# Altium PCB LED.PcbDoc
Units mm, origin at the board's own origin, x right, y up, seen from the top; angles counter-clockwise.
Board outline 80 x 60 mm, 2 copper layers (Top Layer, Bottom Layer), stack 1.671 mm thick; 33 components, 4 nets, 66 pads, 0 vias.
Unrouted connection lines stored in the file: 62.
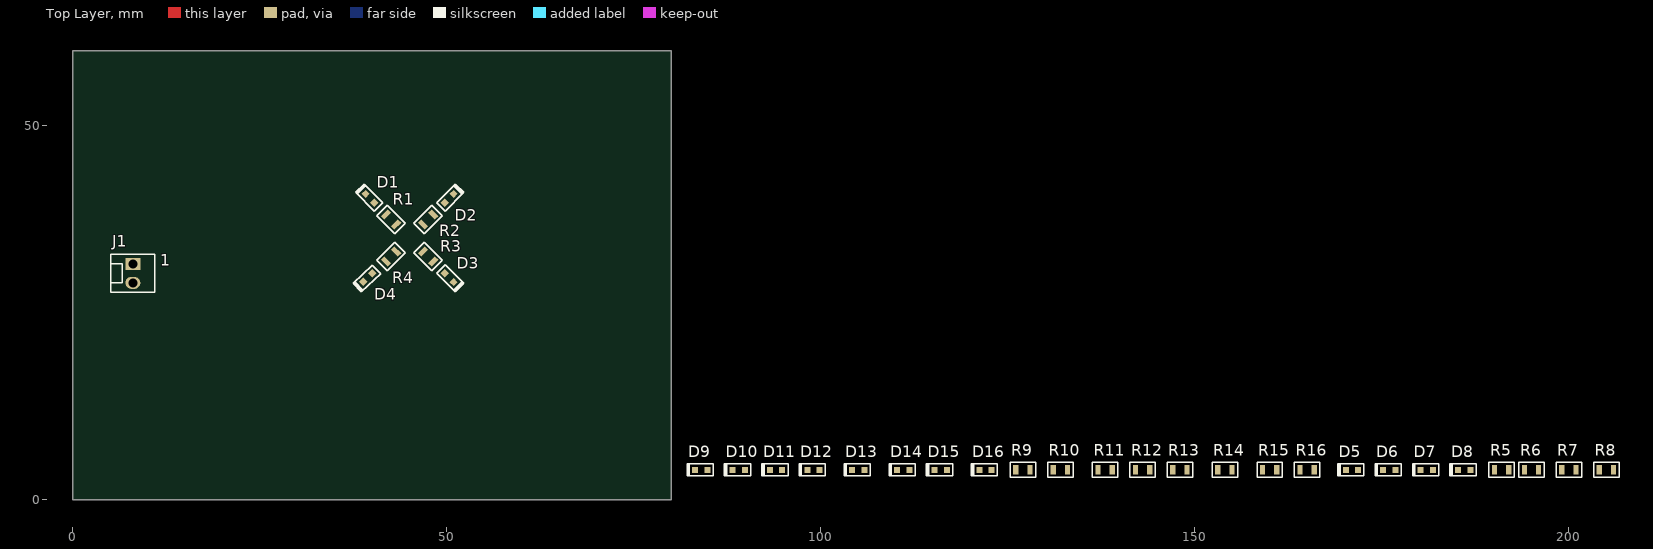
[diagram p0: Top Layer view]
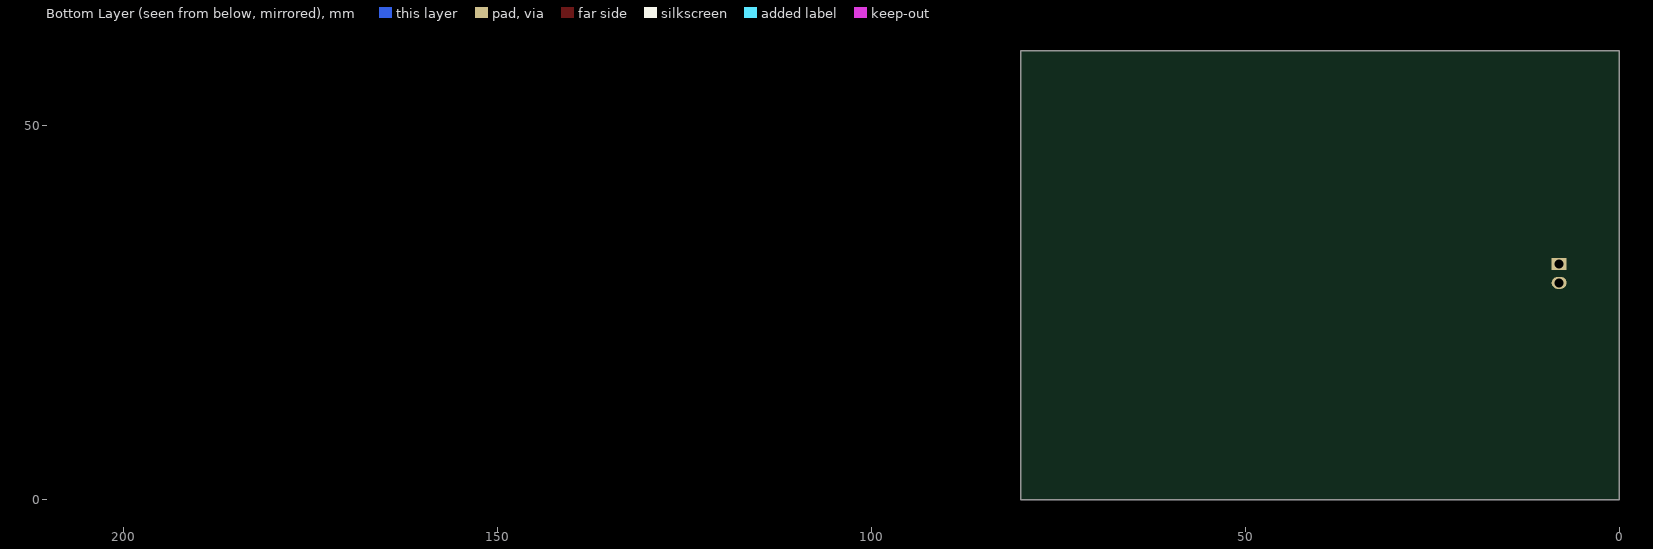
[diagram p1: Bottom Layer view, seen from below]

## Layer stack, top to bottom
Top Solder: solder mask 0.0102, Solder Resist, Dk 3.5
Top Layer: signal copper 0.0356
Dielectric 1: dielectric 1.6, FR-4, Dk 4.8
Bottom Layer: signal copper 0.0356
Bottom Solder: solder mask 0.0102, Solder Resist, Dk 3.5

## Board outline
80,0 80,60 0,60 0,0

## Design rules (kind name [scope] priority, off if disabled: settings)
Clearance [All] p1: gap=0.3 ignorepadtopadclearanceinfootprint=FALSE
PolygonConnect [All] p1: connectstyle=Relief reliefconductorwidth=0.254 reliefentries=4 polygonreliefangle="90 Angle" airgapwidth=0.254
RoutingVias [All] p1: holewidth=0.3 width=0.6 viastyle="Through Hole" minholewidth=0.3 minwidth=0.6 maxholewidth=0.3 maxwidth=0.6
SilkToSolderMaskClearance [IsPad] p1: minsilkscreentomaskgap=0.1 clearancetoexposedcopper=TRUE
SolderMaskExpansion [All] p1: expansion=0.102
Width [All] p1: maxlimit=1 minlimit=0.3 preferedwidth=0.5
29 further rules are at their usual default settings.

## Components (designator, comment, footprint, x,y, rotation, side; value= is the part's Value field where it differs from the comment)
D1 "GREEN" LED0603G 39.697,40.303 r315 top
D2 "GREEN" LED0603G 50.303,40.303 r225 top
D3 "GREEN" LED0603G 50.303,29.697 r135 top
D4 "GREEN" LED0603G 39.402,29.704 r43.41 top
D5 "GREEN" LED0603G 171,4 r0 top
D6 "GREEN" LED0603G 176,4 r0 top
D7 "GREEN" LED0603G 181,4 r0 top
D8 "GREEN" LED0603G 186,4 r0 top
D9 "GREEN" LED0603G 84,4 r0 top
D10 "GREEN" LED0603G 89,4 r0 top
D11 "GREEN" LED0603G 94,4 r0 top
D12 "GREEN" LED0603G 99,4 r0 top
D13 "GREEN" LED0603G 105,4 r0 top
D14 "GREEN" LED0603G 111,4 r0 top
D15 "GREEN" LED0603G 116,4 r0 top
D16 "GREEN" LED0603G 122,4 r0 top
J1 "1x2 Header" HDR1X2 8,31.54 r0 top
R1 "360R" R0805 42.525,37.475 r135 top
R2 "360R" R0805 47.475,37.475 r45 top
R3 "360R" R0805 47.475,32.525 r315 top
R4 "360R" R0805 42.525,32.525 r225 top
R5 "360R" R0805 191,4 r0 top
R6 "360R" R0805 195,4 r0 top
R7 "360R" R0805 200,4 r0 top
R8 "360R" R0805 205,4 r0 top
R9 "360R" R0805 127,4 r0 top
R10 "360R" R0805 132,4 r0 top
R11 "360R" R0805 138,4 r0 top
R12 "360R" R0805 143,4 r0 top
R13 "360R" R0805 148,4 r0 top
R14 "360R" R0805 154,4 r0 top
R15 "360R" R0805 160,4 r0 top
R16 "360R" R0805 165,4 r0 top

## Footprints (in the part's own frame and the unit in brackets; to place one, negate y for a bottom-side part, rotate by r counter-clockwise, add the part's x,y. Pads: shape width x height; smd on the part's side, far side on the other; paste and mask are expansions set on the pad)
HDR1X2 [mm]
  rect 2x1.6 hole 1.2: 1(0,0)
  oval 2x1.6 hole 1.2: 2(0,-2.54)
  silkscreen extent -2.92,-3.81 2.92,1.27, body extent -2.9,-3.81 2.9,1.27, height 11.71
LED0603G [mm]
  rect 0.8x0.8 smd: 1(-0.825,0) 2(0.825,0)
  silkscreen extent -1.9,-0.8 1.6,0.8, body extent -0.8,-0.4 0.8,0.4, height 0.4
R0805 [mm]
  rect 0.7x1.3 smd: 1(-0.95,0) 2(0.95,0)
  silkscreen extent -1.7,-1 1.7,1, body extent -1,-0.62 1,0.62, height 0.61

## Part data
D1 D2 D3 D4 D5 D6 D7 D8 D9 D10 D11 D12 D13 D14 D15 D16: library part LNJ337W83RA, "Standard LEDs - SMD LED GR HI-BRT USS", Case/Package=0603, Case Code (Metric)=1608, Colour=Green,Yellow, Forward Current=20mA, Forward Voltage=1.95V, Illumination Colour=Green, Manufacturer="Panasonic SSG", Max Operating Temperature=85°C, Max Power Dissipation=55mW, Min Operating Temperature=-30°C, Package Quantity=1, Reverse Voltage=4V, Supplier Part Number 1=LNJ337W83RADKR-ND, Test Current=5mA, Case Code (Imperial)=0603, Category=Optoelectronics, ComponentLink1Description=https://datasheet.ciiva.com/6868/lnj337w83ra-aek-6868817.pdf, ComponentLink1URL=https://datasheet.ciiva.com/6868/lnj337w83ra-aek-6868817.pdf, ComponentLink2Description=https://datasheet.ciiva.com/4690/lnj337w83ra-aek-226051-4690026.pdf, ComponentLink2URL=https://datasheet.ciiva.com/4690/lnj337w83ra-aek-226051-4690026.pdf, ComponentLink3Description=https://datasheet.ciiva.com/11775/0900766b80f0a8bb-11775418.pdf, ComponentLink3URL=https://datasheet.ciiva.com/11775/0900766b80f0a8bb-11775418.pdf, Dominant Wavelength=572nm, Height=0.2mm, Lead Free="Lead Free", Length=1.6mm, Lens Style=Rectangular, Luminous Intensity=7.5mcd, Manufacturer Part Number=LNJ337W83RA, Mount="Surface Mount", Number of LEDs=1, Number of Pins=2, Packaging="Tape and Reel", Pricing 1="1=0.48, 10=0.343, 25=0.28, 100=0.2239, 250=0.18888, 500=0.1609, 1000=0.12593, 2500=0.11544 (USD)", REACH SVHC=Yes, Stock 1=200597, Supplier 1=Digi-Key, Wavelength=572nm, Width=0.8mm
J1: library part 22-29-2021, "Headers & Wire Housings 2 PIN F/LK HEADER", Colour=White, Contact Resistance=10mR, Current Rating=4A, Flammability Rating="UL94 V-0", Manufacturer=Molex, Max Operating Temperature=75°C, Max Voltage Rating (AC)=250V, Min Operating Temperature=0°C, Package Quantity=2500, Supplier Part Number 1=WM2744-ND, Category=Connectors, ComponentLink1Description=https://datasheet.ciiva.com/30169/113840022292021-pcb-headers-30169888.pdf, ComponentLink1URL=https://datasheet.ciiva.com/30169/113840022292021-pcb-headers-30169888.pdf, ComponentLink2Description=https://datasheet.ciiva.com/19472/879588-19472951.pdf, ComponentLink2URL=https://datasheet.ciiva.com/19472/879588-19472951.pdf, ComponentLink3Description=https://datasheet.ciiva.com/11752/0900766b80d5fb7a-11752634.pdf, ComponentLink3URL=https://datasheet.ciiva.com/11752/0900766b80d5fb7a-11752634.pdf, ComponentLink4Description=https://datasheet.ciiva.com/5153/0022292021-pcb-headers-159390-5153053.pdf, ComponentLink4URL=https://datasheet.ciiva.com/5153/0022292021-pcb-headers-159390-5153053.pdf, ComponentLink5Description=https://datasheet.ciiva.com/9468/0022292021-pcb-headers-9468301.pdf, ComponentLink5URL=https://datasheet.ciiva.com/9468/0022292021-pcb-headers-9468301.pdf, ComponentLink6Description=https://datasheet.ciiva.com/25908/0022292021-pcb-headers-25908286.pdf, ComponentLink6URL=https://datasheet.ciiva.com/25908/0022292021-pcb-headers-25908286.pdf, Contact Material=Brass, Contact Plating=Gold, Depth=5.8mm, Gender=Male, Glow Wire Compliant=Non-compliant, Halogen Free="Low Halogen", Height=11.7mm, Housing Colour=White, Housing Material=Nylon, Lead Free="Lead Free", Length=12.7mm, Manufacturer Part Number=22-29-2021, Max Current Rating=4A, Mount="Through Hole", Number of Circuits=2, Number of Contacts=2, Number of Positions=2, Number of Rows=1, Orientation=Straight, Packaging=Bulk, Pitch=2.54mm, Pricing 1="1=0.46, 10=0.431, 100=0.3014, 500=0.2583, 1000=0.21525, 5000=0.1845, 10000=0.1722 (USD)", Radiation Hardening=No, REACH SVHC=Unknown, Stock 1=17589, Supplier 1=Digi-Key, Termination="Through Hole", Voltage Rating=250V, Voltage Rating (DC)=250V
R1 R2 R3 R4 R5 R6 R7 R8 R9 R10 R11 R12 R13 R14 R15 R16: library part CRCW0805360RFKEA, "RES SMD 360 OHM 1% 1/8W 0805", Case/Package=0805, Case Code (Metric)=2012, Manufacturer=Vishay, Max Operating Temperature=155°C, Max Power Dissipation=125mW, Min Operating Temperature=-55°C, Package Quantity=10, Supplier Part Number 1=541-360CDKR-ND, Temperature Coefficient=100ppm/°C, Tolerance=1%, Voltage Rating=150V, Case Code (Imperial)=0805, Category=Resistors, ComponentLink1Description=https://datasheet.ciiva.com/11812/0900766b80d98b26-11812609.pdf, ComponentLink1URL=https://datasheet.ciiva.com/11812/0900766b80d98b26-11812609.pdf, ComponentLink2Description=https://datasheet.ciiva.com/7881/1697337-7881957.pdf, ComponentLink2URL=https://datasheet.ciiva.com/7881/1697337-7881957.pdf, ComponentLink3Description=https://datasheet.ciiva.com/7881/1697337-7881958.pdf, ComponentLink3URL=https://datasheet.ciiva.com/7881/1697337-7881958.pdf, ComponentLink4Description=https://datasheet.ciiva.com/8942/dcrcwe3-8942598.pdf, ComponentLink4URL=https://datasheet.ciiva.com/8942/dcrcwe3-8942598.pdf, ComponentLink5Description=https://datasheet.ciiva.com/22674/1847332-22674713.pdf, ComponentLink5URL=https://datasheet.ciiva.com/22674/1847332-22674713.pdf, ComponentLink6Description=https://datasheet.ciiva.com/2467/dcrcwe3-2467773.pdf, ComponentLink6URL=https://datasheet.ciiva.com/2467/dcrcwe3-2467773.pdf, ComponentLink7Description=https://datasheet.ciiva.com/2467/dcrcwe3-2467774.pdf, ComponentLink7URL=https://datasheet.ciiva.com/2467/dcrcwe3-2467774.pdf, ComponentLink8Description=https://datasheet.ciiva.com/5543/dcrcwe3-109170-5543710.pdf, ComponentLink8URL=https://datasheet.ciiva.com/5543/dcrcwe3-109170-5543710.pdf, ComponentLink9Description=https://datasheet.ciiva.com/2467/dcrcwe3-2467775.pdf, ComponentLink9URL=https://datasheet.ciiva.com/2467/dcrcwe3-2467775.pdf, Composition="Thick Film", Contact Plating=Tin, Depth=1.25mm, Features="Automotive AEC-Q200", Height=0.45mm, Lead Free="Lead Free", Length=2mm, Manufacturer Part Number=CRCW0805360RFKEA, Military Standard=Not, Number of Pins=2, Number of Terminations=2, Packaging="Tape and Reel", Power Rating=125mW, Pricing 1="1=0.1, 10=0.055, 100=0.0223, 1000=0.01003, 2500=0.0087 (USD)", Radiation Hardening=No, REACH SVHC=Unknown, Resistance=360R, Stock 1=29980, Supplier 1=Digi-Key, Termination=SMD/SMT, Voltage Rating (DC)=150V, Weight=0.000194oz, Width=0.049inch

## Nets (pads, with @x,y where several pads share a name; then routed paths per layer and width w, separated by ;. In a path a pad name is that pad's centre, name@x,y a point inside that pad or via, vN(x,y) a via of type N, cw(c..) or ccw(c..) an arc to the next point about the centre after c; other vN are vias at no path point)
+3V3: J1.1 R1.1 R2.1 R3.1 R4.1 R5.1 R6.1 R7.1 R8.1 R9.1 R10.1 R11.1 R12.1 R13.1 R14.1 R15.1 R16.1
DIODE1: D2.2 D4.2 D6.2 D8.2 D10.2 D12.2 D14.2 D16.2 R2.2 R4.2 R6.2 R8.2 R10.2 R12.2 R14.2 R16.2
DIODE2: D1.2 D3.2 D5.2 D7.2 D9.2 D11.2 D13.2 D15.2 R1.2 R3.2 R5.2 R7.2 R9.2 R11.2 R13.2 R15.2
GND: D1.1 D2.1 D3.1 D4.1 D5.1 D6.1 D7.1 D8.1 D9.1 D10.1 D11.1 D12.1 D13.1 D14.1 D15.1 D16.1 J1.2

## Text inside footprints (layer, text, board x,y; h text height)
J1: Top Overlay "1" at 11.683,31.286 h1.52